# Altium PCB BA16_mema_1_layout.PcbDoc
Units mm, origin at the board's own origin, x right, y up, seen from the top; angles counter-clockwise.
Board outline 42 x 70 mm, 2 copper layers (Top Layer, Bottom Layer); 54 components, 30 nets, 139 pads, 13 vias.
Unrouted connection lines stored in the file: 11.
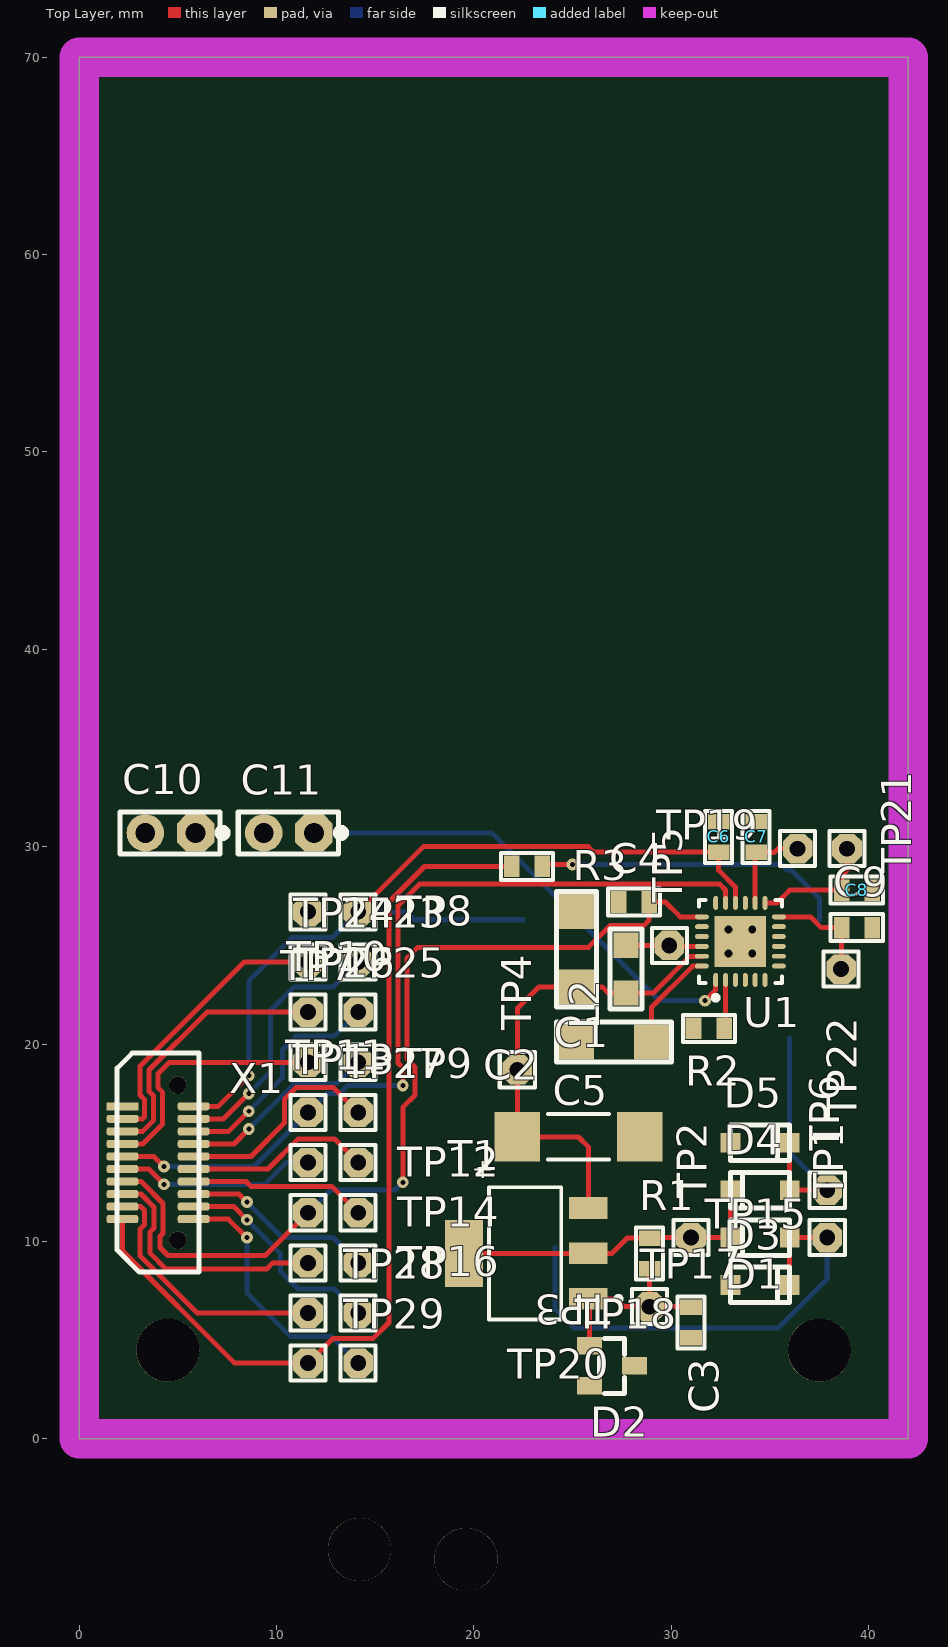
[diagram p0: Top Layer view]
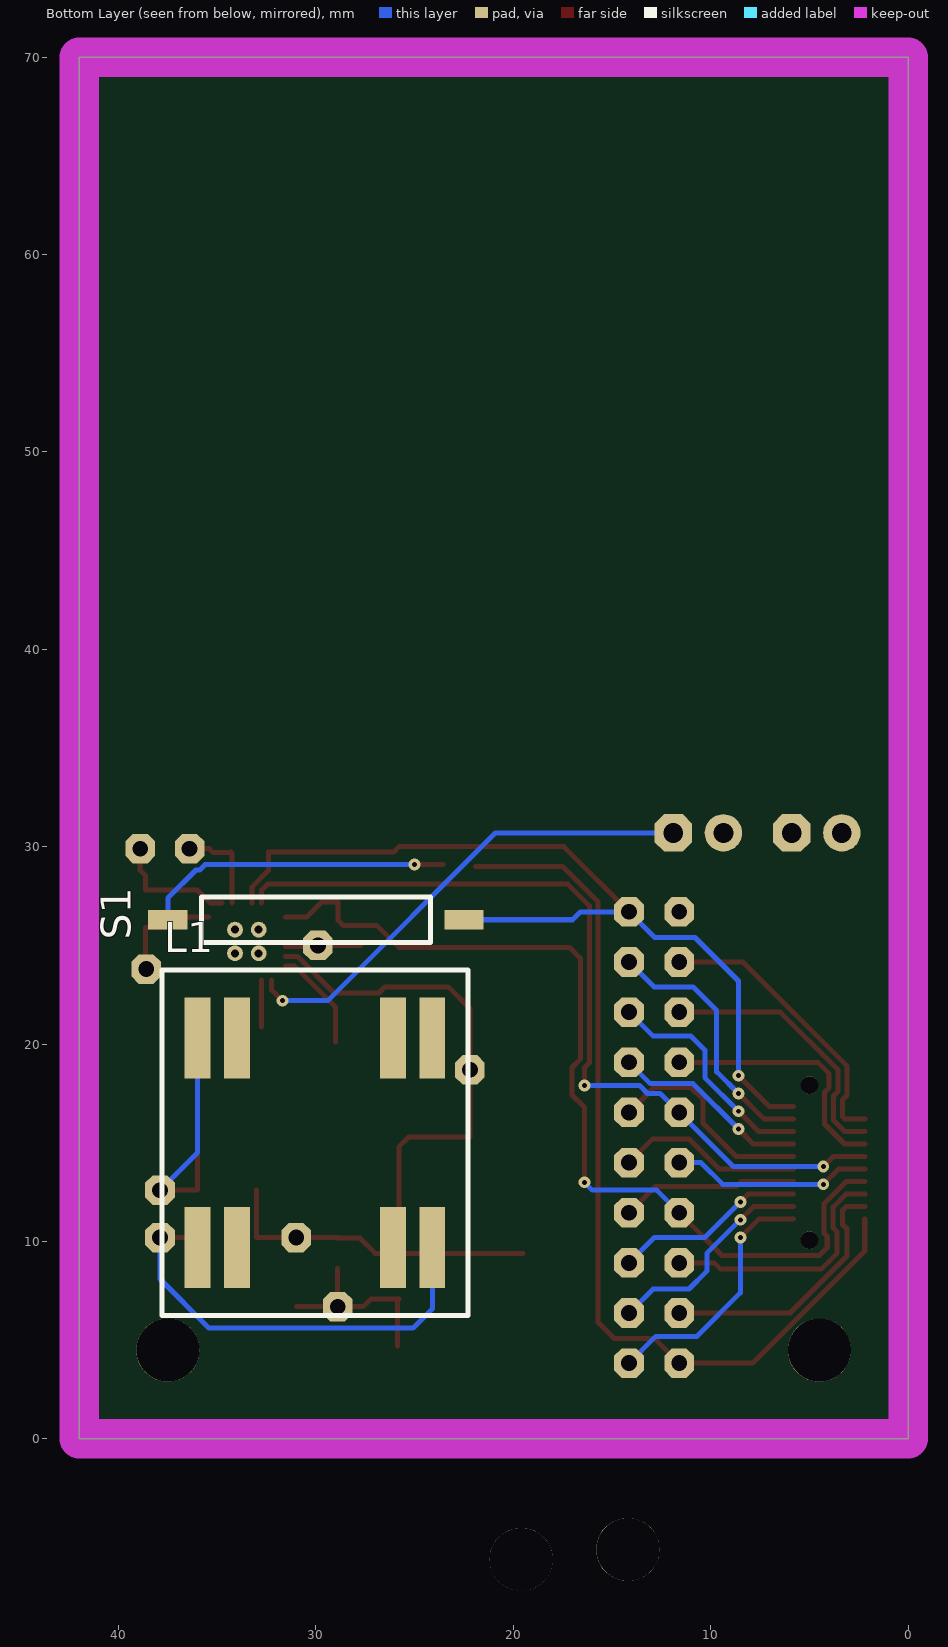
[diagram p1: Bottom Layer view, seen from below]

## Layer stack, top to bottom
Top Solder: solder mask 0.0102, Solder Resist, Dk 3.5
Top Layer: signal copper 0.0356
Dielectric 1: dielectric 0.32, FR-4, Dk 4.8
Bottom Layer: signal copper 0.0356
Bottom Solder: solder mask 0.0102, Solder Resist, Dk 3.5

## Board outline
0,0 0,70 42,70 42,0

## Design rules (kind name [scope] priority, off if disabled: settings)
Clearance Clearance_EM8500 [All] p1: gap=0.2
Clearance [All] p2: gap=0.254
ComponentClearance ComponentClearance_ELKO_FLEX [HasFootprint('C_RAD_flex')] p1: gap=-5 collisioncheckmode=3 verticalgap=0.254 showdistances=FALSE
ComponentClearance ComponentClearance_TP [HasFootprint('TP SMD')] p2: gap=0 collisioncheckmode=3 verticalgap=0 showdistances=FALSE
ComponentClearance [All] p3: gap=0.254 collisioncheckmode=3 verticalgap=0.254 showdistances=FALSE
PolygonConnect [All] p1: connectstyle=Relief reliefconductorwidth=0.254 reliefentries=4 polygonreliefangle="90 Angle" airgapwidth=0.254
RoutingVias [All] p1: holewidth=0.711 width=1.27 viastyle="Through Hole" minholewidth=0.711 minwidth=1.27 maxholewidth=0.711 maxwidth=1.27
SilkToSilkClearance SilkToSilkClearance_TP [HasFootprint('TP SMD')] p1: silktosilkclearance=0
SilkToSilkClearance [All] p2: silktosilkclearance=0.254
SolderMaskExpansion [All] p1: expansion=0.102
Width [All] p1: maxlimit=0.254 minlimit=0.254 preferedwidth=0.254
28 further rules are at their usual default settings.

## Components (designator, comment, footprint, x,y, rotation, side; value= is the part's Value field where it differs from the comment)
C1 "Cap" "CHIP 1206" 25.2,22.9 r90 top
C2 "47uF 25V" "TANT D" 25.3,15.3 r0 top
C3 "1nF" "CHIP 0603" 31,5.9 r90 top
C4 "Cap" "CHIP 0603" 28.1,27.2 r180 top
C5 "Cap" "CHIP 1206" 29,20.1 r180 top
C6 "Cap" "CHIP 0603" 32.4,30.5 r90 top
C7 "Cap" "CHIP 0603" 34.3,30.5 r90 top
C8 "Cap" "CHIP 0603" 39.4,27.8 r0 top
C9 "Cap" "CHIP 0603" 39.4,25.9 r0 top
C10 "3300uF 25V" "JMP 1X2" 5.9,30.7 r180 top
C11 "470uF 25V" "JMP 1X2" 11.9,30.7 r180 top
D1 "1N5819" SOD-123 34.5,10.2 r180 top
D2 "BAS16" SOT-23 27,3.7 r270 top
D3 "1N5819" SOD-123 34.5,7.8 r0 top
D4 "1N5819" SOD-123 34.5,12.6 r180 top
D5 "1N5819" SOD-123 34.5,15 r0 top
L1 "X-Wicklung" PREMO_3115N_0238J_2 24.1,20.3 r270 bottom
L2 "L" "CHIP 0805" 27.7,23.8 r270 top
R1 "1M" "CHIP 0603" 28.9,9.4 r90 top
R2 "R" "CHIP 0603" 31.9,20.8 r180 top
R3 "10k 0603" "CHIP 0603" 22.7,29 r0 top
S1 "Reed Switch" MK16-C-2 30,26.3 r180 bottom
T1 "BSP149" SOT-223 25.8,7.1 r90 top
TP1 "TP" TP 37.9,10.2 r90 top
TP2 "TP" TP 31,10.2 r90 top
TP3 "TP" TP 28.9,6.7 r90 top
TP4 "TP" TP 22.2,18.7 r90 top
TP5 "TP" TP 29.9,25 r0 top
TP6 "TP" TP 37.9,12.6 r90 top
TP7 "TP" TP 11.6,26.7 r0 top
TP8 "TP" TP 14.14,26.7 r0 top
TP9 "TP" TP 14.14,19.08 r0 top
TP10 "TP" TP 11.6,19.08 r90 top
TP11 "TP" TP 11.6,16.54 r90 top
TP12 "TP" TP 14.14,14 r90 top
TP13 "TP" TP 11.6,14 r90 top
TP14 "TP" TP 14.14,11.46 r90 top
TP15 "TP" TP 11.6,11.46 r90 top
TP16 "TP" TP 14.14,8.92 r90 top
TP17 "TP" TP 11.6,8.92 r90 top
TP18 "TP" TP 11.6,6.38 r90 top
TP19 "TP" TP 36.4,29.9 r90 top
TP20 "TP" TP 11.6,3.84 r90 top
TP21 "TP" TP 38.9,29.9 r90 top
TP22 "TP" TP 38.6,23.8 r90 top
TP23 "TP" TP 14.14,24.16 r90 top
TP24 "TP" TP 11.6,24.16 r90 top
TP25 "TP" TP 14.14,21.62 r90 top
TP26 "TP" TP 11.6,21.62 r90 top
TP27 "TP" TP 14.14,16.54 r90 top
TP28 "TP" TP 14.14,6.38 r90 top
TP29 "TP" TP 14.14,3.84 r90 top
U1 "em8500" QFN-24 33.5,25.2 r90 top
X1 "LSS-110-01-F-DV-A-TR" "HEADER SMD 2X10 0.635MM" 2.2,16.85 r0 top locked

## Footprints (in the part's own frame and the unit in brackets; to place one, negate y for a bottom-side part, rotate by r counter-clockwise, add the part's x,y. Pads: shape width x height; smd on the part's side, far side on the other; paste and mask are expansions set on the pad)
"CHIP 0603" [mil] "Chip 0603 Body 1.6x0.8mm"
  rect 31x43 smd: 1(-30.5,0) 2(30.5,0)
  silkscreen extent -52,-27 52,27
"CHIP 0805" [mil] "Chip 0805 Body 2.0x1.2mm"
  rect 50x50 smd: 1(-47.5,0) 2(47.5,0)
  silkscreen extent -80,-32 80,32
"CHIP 1206" [mil] "Chip 1206 Body 3.2x1.6mm"
  rect 70x70 smd: 1(0,0) 2(150,0)
  silkscreen extent -40,-40 190,40
"HEADER SMD 2X10 0.635MM" [mm] "LSS-110-01-F-DV-A"
  round 0.89 hole 0.89 unplated: 0(2.8,-6.783) 0(2.8,1.068)
  rect 1.6x0.4 smd: 1(0,0)
  rrect50% 1.6x0.4 smd: 2(3.6,0) 3(0,-0.635) 4(3.6,-0.635) 5(0,-1.27) 6(3.6,-1.27) 7(0,-1.905) 8(3.6,-1.905) 9(0,-2.54) 10(3.6,-2.54) 11(0,-3.175) 12(3.6,-3.175) 13(0,-3.81) 14(3.6,-3.81) 15(0,-4.445) 16(3.6,-4.445) 17(0,-5.08) 18(3.6,-5.08) 19(0,-5.715) 20(3.6,-5.715)
  silkscreen extent -0.27,-8.4 3.87,2.69
"JMP 1X2" [mm] "Jumper-Array 2 Pol"
  oct 1.9x1.9 hole 1: 1(0,0)
  round 1.9 hole 1: 2(2.54,0)
  silkscreen extent -1.57,-1.07 3.84,1.07
MK16-C-2 [mm] "REED SENSOR"
  rect 2x1 smd: 1(-7.5,0) 2(7.5,0)
  silkscreen extent -5.8,-1.15 5.8,1.15
PREMO_3115N_0238J_2 [mm] "3D Coil 15x15 2.38mH +/-5% @125kHz"
  rect 4.1x1.3 smd: 1(0,0) 2(0,-2) 3(0,-9.9) 4(0,-11.9) 5(10.6,-11.9) 6(10.6,-9.9) 7(10.6,-2) 8(10.6,0)
  silkscreen extent -3.45,-13.7 14.05,1.8
QFN-24 [mm] "24-Pin Plastic Quad Flat No-Lead 0.5 mm Pitch"
  oval 0.7x0.25 smd: 1(-1.95,1.25) 2(-1.95,0.75) 3(-1.95,0.25) 4(-1.95,-0.25) 5(-1.95,-0.75) 6(-1.95,-1.25) 13(1.95,-1.25) 14(1.95,-0.75) 15(1.95,-0.25) 16(1.95,0.25) 17(1.95,0.75) 18(1.95,1.25)
  oval 0.25x0.7 smd: 7(-1.25,-1.95) 8(-0.75,-1.95) 9(-0.25,-1.95) 10(0.25,-1.95) 11(0.75,-1.95) 12(1.25,-1.95) 19(1.25,1.95) 20(0.75,1.95) 21(0.25,1.95) 22(-0.25,1.95) 23(-0.75,1.95) 24(-1.25,1.95)
  round 0.8 hole 0.4: 25(-0.6,-0.6) 25(-0.6,0.6) 25(0.6,-0.6) 25(0.6,0.6)
  rect 2.6x2.6 smd: 25(0,0)
  silkscreen extent -2.97,-2.1 2.1,2.1, body extent -2.07,-2.07 2.07,2.07, height 1
SOD-123 [mm] "Diodengehäuse"
  rect 1x1 smd: 1(-1.5,0) 2(1.5,0)
  silkscreen extent -1.5,-0.9 1.5,0.9
SOT-23 [mil]
  rect 35x50 smd: 1(-40,-45) 2(40,-45) 3(0,45)
  silkscreen extent -55,-25 55,25
SOT-223 [mm] "SOT-223/SC-73; 4 Leads; Body 6.7 x 7.3 mm, inc. leads (LxW max)"
  rect 1.1x1.95 smd: 1(0,0) 2(2.3,0) 3(4.6,0)
  rect 3.4x1.95 smd: 4(2.3,6.3)
  silkscreen extent -1.05,-1.65 5.65,5.02
"TANT D" [mm] "Chip Capacitor TANT D 7.3x4.3mm"
  rect 2.3x2.5 smd: 1(-3.1,0) 2(3.1,0)
  silkscreen extent -1.55,-1.15 1.55,1.15, body extent -3.65,-2.15 3.65,2.15, height 2.23
TP [mm] "Testpoint"
  oct 1.5x1.5 hole 0.8: 1(0,0)
  silkscreen extent -0.89,-0.89 0.89,0.89

## Part data
C1 C4 C5 C6 C7 C8 C9: library part C, "Capacitor"
C2 C10 C11: library part "C POL", "Capasitor Polarisiert"
C3: library part "C 50V", "Capacitor 50V"
D1 D2 D3 D4 D5: library part D, "Diode"
L1: library part "PREMO 3015 0238J 2", "Inductor"
L2: "Ind"
R1 R3: library part R, "Resistor"
R2: "Resistor"
S1: library part "SWITCH MICRO NO", "Switch Micro Normal Open"
T1: "MOSFET N-Kanal"
TP1 TP2 TP3 TP4 TP5 TP6 TP7 TP8 TP9 TP10 TP11 TP12 TP13 TP14 TP15 TP16 TP17 TP18 TP19 TP20 TP21 TP22 TP23 TP24 TP25 TP26 TP27 TP28 TP29: library part TP_SMD, "Testpoint SMD"
X1: library part "HDR 20 POL ABW", "Header 100 mil 20 Pol"

## Free pads (board coordinates)
  round 3.2 hole 3.2 unplated: 0(4.5,4.5) 0(14.2,-5.6) 0(19.6,-6.1) 0(37.5,4.5)

## Via types
v1: diameter 0.6, hole 0.25, Top Layer to Bottom Layer, 13 vias

## Nets (pads, with @x,y where several pads share a name; then routed paths per layer and width w, separated by ;. In a path a pad name is that pad's centre, name@x,y a point inside that pad or via, vN(x,y) a via of type N, cw(c..) or ccw(c..) an arc to the next point about the centre after c; other vN are vias at no path point)
BAT_LOW: TP13.1 U1.18 X1.11 | length 10.2
  Top Layer w0.254: X1.11 3.525,13.675 v1(4.3,12.9)
  Bottom Layer w0.254: v1(4.3,12.9) 9.4,12.9 10.5,14 TP13.1
EM_CS: TP9.1 U1.7 X1.8 | length 10.1
  Top Layer w0.254: X1.8 7.845,14.945 v1(8.6,15.7)
  Bottom Layer w0.254: v1(8.6,15.7) 10.9,18 13.06,18 TP9.1
GND: C1.2 C2.2 C3.1 C4.2 C5.2 C6.2 C7.2 C8.2 C9.2 C10.2 C11.2 D2.2 D2.3 D3.1 D5.1 R2.2 TP7.1 U1.20 U1.21 X1.1
HRV_LOW: TP11.1 U1.17 X1.9 | length 43.1
  Top Layer w0.254: X1.9 3.79,14.31 v1(4.3,13.8) ; v1(16.4,17.9) 16.4,18.8 16.154,19.046 16.154,27.012 17.242,28.1 32.458,28.1 32.75,27.808 U1.17
  Bottom Layer w0.254: v1(4.3,13.8) 8.86,13.8 TP11.1 12.56,17.5 13.202,17.5 13.602,17.9 v1(16.4,17.9)
MCU_MISO: TP14.1 U1.5 X1.14 | length 9
  Top Layer w0.254: X1.14 8.46,13.04 8.7,12.8 12.8,12.8 TP14.1
MCU_MOSI: TP12.1 U1.4 X1.12 | length 9.5
  Top Layer w0.254: X1.12 9.575,13.675 11.1,15.2 12.94,15.2 TP12.1
MCU_SCLK: TP16.1 U1.6 X1.16 | length 9.8
  Top Layer w0.254: X1.16 8.095,12.405 v1(8.5,12)
  Bottom Layer w0.254: v1(8.5,12) 10.3,10.2 12.86,10.2 TP16.1
NetC3_2: C3.2 D2.1 R1.1 T1.1 TP3.1 | length 9.6
  Top Layer w0.254: T1.1 27.2,7.1 27.6,6.7 TP3.1 ; D2.1 T1.1@25.857,7.043 ; R1.1 TP3.1 ; C3.2@30.975,6.7 TP3.1
NetD1_1: D1.1 D3.2 L1.8 TP1.1 | length 24.7
  Top Layer w0.254: D3.2 D1.1 TP1.1
  Bottom Layer w0.254: L1.8 24.1,6.6 25.077,5.623 35.423,5.623 37.9,8.1 TP1.1
NetD1_2: D1.2 D4.2 R1.2 T1.2 T1.4 TP2.1 | length 16.2
  Top Layer w0.254: T1.4 T1.2 27,9.4 27.775,10.175 R1.2 ; R1.2@28.925,10.2 TP2.1 D1.2 D4.2
NetD4_1: D4.1 D5.2 L1.4 TP6.1 | length 12.8
  Top Layer w0.254: D5.2 D4.1 TP6.1
  Bottom Layer w0.254: L1.4 36,14.5 TP6.1
NetL2_1: L2.1 TP5.1 U1.22 | length 3.8
  Top Layer w0.254: L2.1@27.707,25 TP5.1 ; TP5.1@29.95,24.95 U1.22
NetR3_2: R3.2 S1.1 | length 15.7
  Top Layer w0.254: R3.2@23.575,29.1 v1(25,29.1)
  Bottom Layer w0.254: v1(25,29.1) 35.613,29.1 35.89,28.823 36.077,28.823 37.5,27.4 S1.1
NetTP23_1: TP23.1 X1.4 | length 13.4
  Top Layer w0.254: X1.4 7.315,16.215 v1(8.6,17.5)
  Bottom Layer w0.254: v1(8.6,17.5) 9.7,18.6 9.7,21.7 10.9,22.9 12.88,22.9 TP23.1
NetTP24_1: TP24.1 X1.3 | length 14.5
  Top Layer w0.254: X1.3 3.215,16.215 3.327,16.327 3.327,17.185 3.092,17.42 3.092,18.876 8.376,24.16 TP24.1
NetTP25_1: TP25.1 X1.6 | length 11.7
  Top Layer w0.254: X1.6 7.58,15.58 v1(8.6,16.6)
  Bottom Layer w0.254: v1(8.6,16.6) 10.3,18.3 10.3,19.7 11,20.4 12.92,20.4 TP25.1
NetTP26_1: TP26.1 X1.5 | length 13.7
  Top Layer w0.254: X1.5 3.222,15.58 3.781,16.139 3.781,17.373 3.546,17.608 3.546,18.688 6.478,21.62 TP26.1
NetTP27_1: TP27.1 X1.10 | length 11
  Top Layer w0.254: X1.10 8.71,14.31 10.4,16 10.4,17.2 11,17.8 12.88,17.8 TP27.1
NetTP28_1: TP28.1 X1.18 | length 11.1
  Top Layer w0.254: X1.18 7.83,11.77 v1(8.5,11.1)
  Bottom Layer w0.254: v1(8.5,11.1) 10.2,9.4 10.2,8.5 11.1,7.6 12.92,7.6 TP28.1
NetTP29_1: TP29.1 X1.20 | length 13
  Top Layer w0.254: X1.20 7.565,11.135 v1(8.5,10.2)
  Bottom Layer w0.254: v1(8.5,10.2) 8.5,7.4 10.7,5.2 12.78,5.2 TP29.1
REED_SWITCH: R3.1 TP20.1 X1.19 | length 46.6
  Top Layer w0.254: X1.19 2.2,9.525 7.885,3.84 TP20.1 12.86,5.1 14.9,5.1 15.7,5.9 15.7,27.2 17.5,29 R3.1
VAUX_VCC0: C9.1 TP22.1 U1.12 | length 5.5
  Top Layer w0.254: U1.12 37.05,26.45 37.6,25.9 C9.1 TP22.1@38.625,23.825
VAUX_VCC1: C8.1 TP21.1 U1.13 | length 6.4
  Top Layer w0.254: U1.13 35.35,27.15 36,27.8 C8.1 38.625,28.525 38.9,28.8 TP21.1
VAUX_VCC2: C7.1 TP19.1 U1.14 | length 4.8
  Top Layer w0.254: U1.14 34.25,29.675 C7.1 34.325,29.7 35.2,29.7 35.4,29.9 TP19.1
VCC: C1.1 C2.1 L2.2 T1.3 TP4.1 U1.23 | length 24.1
  Top Layer w0.254: T1.3 25.8,14.8 25.3,15.3 C2.1 TP4.1 22.2,21.8 23.3,22.9 C1.1 26.5,22.9 26.806,22.594 L2.2 29.081,22.594 30.937,24.45 U1.23
VCC_LTS: C5.1 C10.1 TP18.1 U1.24 X1.17 | length 18.5
  Top Layer w0.254: X1.17 3.13,11.77 3.327,11.573 3.327,10.858 3.1,10.631 3.1,9.267 5.987,6.38 TP18.1 ; C5.1 29,21.871 31.079,23.95 U1.24
VCC_STS: C11.1 TP17.1 U1.1 X1.15 | length 37.4
  Top Layer w0.254: X1.15 3.137,12.405 3.8,11.742 3.8,10.689 3.6,10.489 3.6,9.409 4.409,8.6 9.5,8.6 9.82,8.92 TP17.1 ; v1(31.7,22.2) 32.25,22.75 U1.1
  Bottom Layer w0.254: C11.1 20.9,30.7 29.4,22.2 v1(31.7,22.2)
VREG: C4.1 TP15.1 U1.19 X1.13 | length 47.6
  Top Layer w0.254: X1.13 3.144,13.04 4.254,11.93 4.254,10.413 4.1,10.259 4.1,9.7 4.504,9.295 9.435,9.295 TP15.1 ; v1(16.4,13) 16.4,16.8 17.027,17.427 17.027,18.815 16.608,19.234 16.608,24.354 17.154,24.9 25.8,24.9 26.9,26 28.6,26 28.875,26.275 C4.1 29.7,27.2 30.45,26.45 U1.19
  Bottom Layer w0.254: TP15.1 12.74,12.6 16,12.6 v1(16.4,13)
VSUP: C6.1 S1.2 TP8.1 U1.16 X1.2 | length 46.4
  Top Layer w0.254: X1.2 7.05,16.85 v1(8.6,18.4) ; TP8.1 17.44,30 25.8,30 26.075,29.725 C6.1 32.4,28.8 33.25,27.95 U1.16
  Bottom Layer w0.254: v1(8.6,18.4) 8.6,23.2 10.8,25.4 12.84,25.4 TP8.1 16.6,26.7 17,26.3 S1.2
WAKE_UP: R2.1 TP10.1 U1.2 X1.7 | length 15.3
  Top Layer w0.254: X1.7 3.229,14.945 4.235,15.951 4.235,17.562 4,17.797 4,18.5 4.58,19.08 TP10.1 ; R2.1@32.75,20.875 U1.2
pads on no net: L1.1 L1.2 L1.3 L1.5 L1.6 L1.7 U1.3 U1.8 U1.9 U1.10 U1.11 U1.15 U1.25 X1.0

## Polygon pours and split planes (outlines as drawn)
GND on Top Layer "Top Layer-GND" (solid, remove dead copper, shelved, pour order 2): 0,70 0,0 42,0 42,70
GND on Bottom Layer "Bottom Layer-GND" (solid, remove dead copper, shelved, pour order 4): 0,70 0,0 42,0 42,70

## Keep-outs
Top Layer:
  the board outline again, w2
Bottom Layer:
  the board outline again, w2

## Silkscreen, mask and mechanical layers (free items; w line width, h text height)
Mechanical 1:
  lines w0.254: 0,8.45 42,8.45 ; 0,19.55 42,19.55 ; 0,32 42,32 ; 1.91,0 1.91,70 ; 0,0 0,70 42,70 42,0 0,0

## Text inside footprints (layer, text, board x,y; h text height)
C2: Top Overlay "+" at 21.025,14.075 h1 r180